# EAGLE board ElectroLab (EAGLE 9.5.1), part 1 of 2
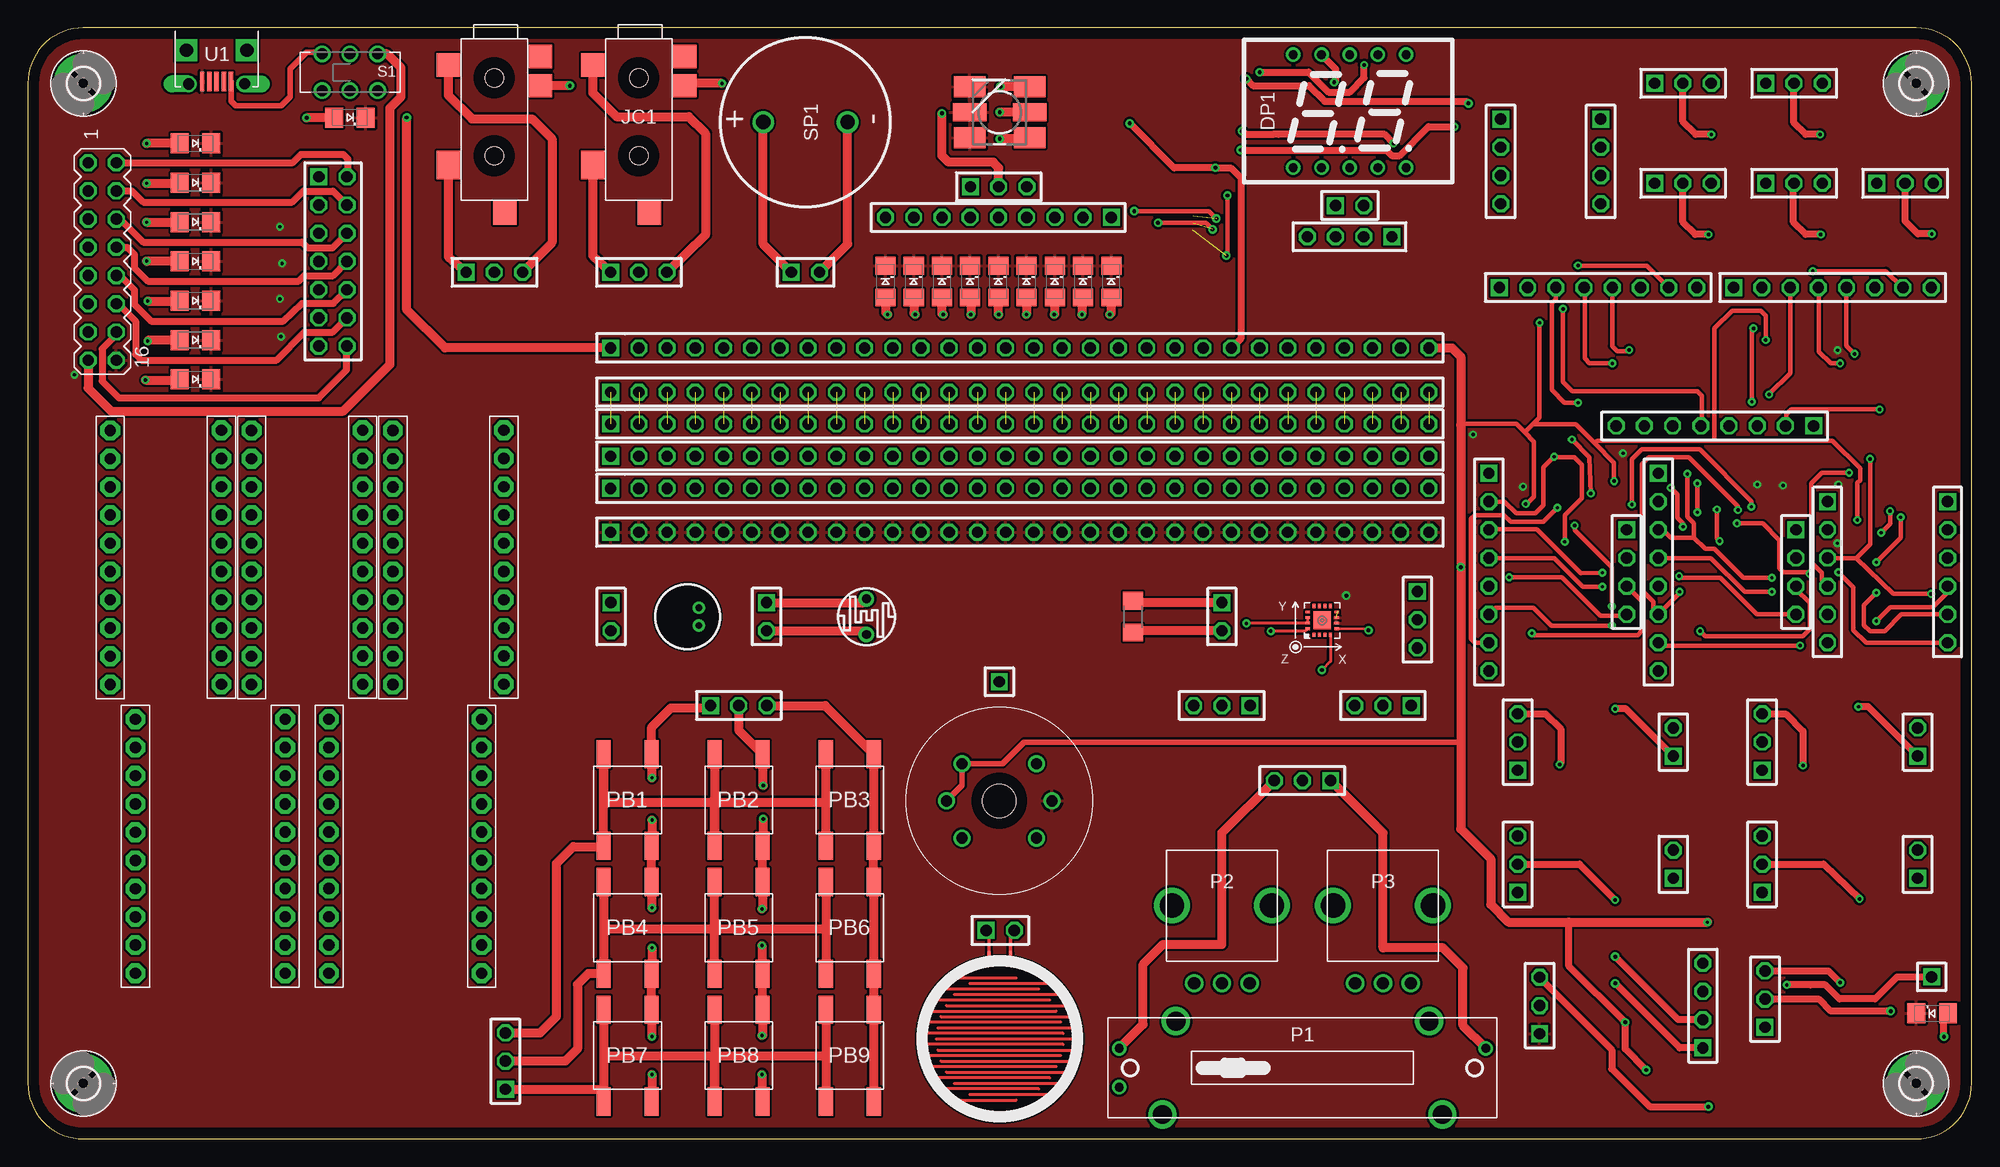
[diagram p0: board, top side]
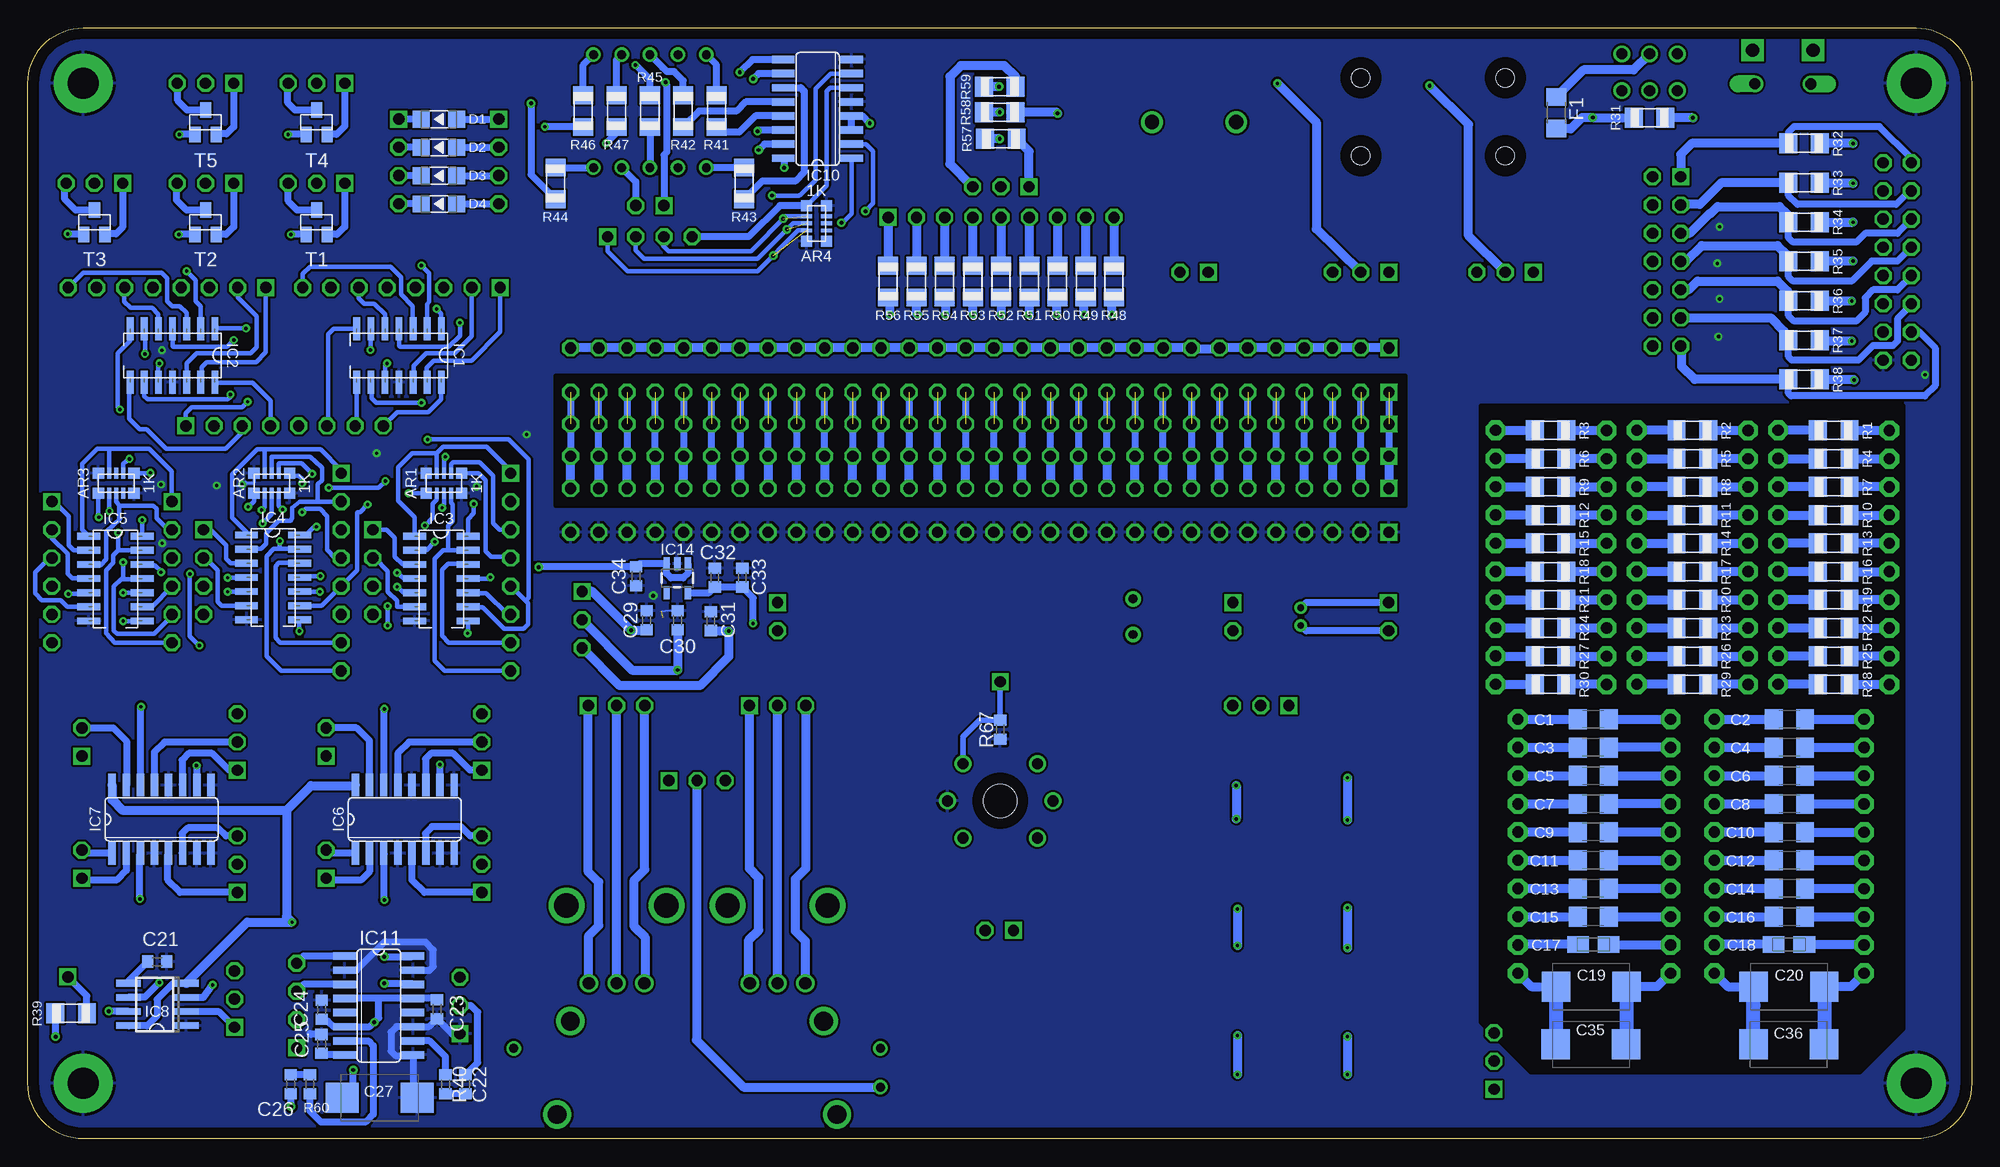
[diagram p1: board, bottom side, seen from below]

Size 175 x 100 mm. Coordinates in mm from the lower left corner, seen from the top.
Outline: 0,5 arc90 5,0 170,0 arc90 175,5 175,95 arc90 170,100 5,100 arc90 0,95 0,5
Copper layers (1*16): Top 0.035mm / dielectric 1.5mm / Bottom 0.035mm
Design rules "PCBWay": minimum track width 6mil, minimum drill 0.3mm, track to track 0.205mm, track to pad 0.205mm, pad to pad 0.205mm, via to via 0.205mm, smd to smd 8mil, copper to edge 40mil, drill to drill 8mil, minimum pad ring 10mil, minimum via ring 8mil, stop-mask expansion 4mil, vias tented up to drill 25mil, thermal gap 10mil
bRestrict: area 6.2,6 to 44.2,66; area 51,57 to 127.5,68.7

## Footprints (pad centres in the part's own frame; a part is rotated, then mirrored left to right if it is on the bottom)
RESISTOR_ARRAY_X8_CAY17 = smd 1 x 1: 1 -1.6,-0.9; 5 1.6,-0.9; 6 1.6,0.9; 10 -1.6,0.9 | smd 0.34 x 1: 2 -0.64,-0.9; 3 0,-0.9; 4 0.64,-0.9; 7 0.64,0.9; 8 0,0.9; 9 -0.64,0.9
C1206 = smd 1.6 x 1.8: 1 -1.4,0; 2 1.4,0
A/3216-18R = smd 1.95 x 1.5: + 1.375,0; - -1.375,0
D/7343-31R = smd 2.55 x 2.7: + 3.175,0; - -3.175,0
0603 = smd 1 x 1.1: 1 -0.86,0; 2 0.84,0
D/7343-31W = smd 2.95 x 2.7: + 3.375,0; - -3.375,0
LED-1206 = smd 1.5 x 1.5: + -1.6,0; - 1.6,0
2X7_SEGMENT_COMMON_CATODE_12_PINS = drill 0.8: 1 -5.08,-5.08; 2 -2.54,-5.08; 3 0,-5.08; 4 2.54,-5.08; 5 5.08,-5.08; 6 5.08,5.08; 7 2.54,5.08; 8 0,5.08; 9 -2.54,5.08; 10 -5.08,5.08
R1206 = smd 1.6 x 1.803: 1 -1.422,0; 2 1.422,0
2,8-PAD = drill 2.8 pad 5.334: B2,8 0,0
SOIC127P600X175-14N = smd 2.057 x 0.61: 1 -4.801,7.62; 2 -4.801,6.35; 3 -4.801,5.08; 4 -4.801,3.81; 5 -4.801,2.54; 6 -4.801,1.27; 7 -4.801,0; 8 0,0; 9 0,1.27; 10 0,2.54; 11 0,3.81; 12 0,5.08; 13 0,6.35; 14 0,7.62
SO16 = smd 0.66 x 2.032: 1 -4.445,-3.073; 2 -3.175,-3.073; 3 -1.905,-3.073; 4 -0.635,-3.073; 5 0.635,-3.073; 6 1.905,-3.073; 7 3.175,-3.073; 8 4.445,-3.073; 9 4.445,3.073; 10 3.175,3.073; 11 1.905,3.073; 12 0.635,3.073; 13 -0.635,3.073; 14 -1.905,3.073; 15 -3.175,3.073; 16 -4.445,3.073
SO08 = smd 0.6 x 2.2: 1 -1.905,-2.6; 2 -0.635,-2.6; 3 0.635,-2.6; 4 1.905,-2.6; 5 1.905,2.6; 6 0.635,2.6; 7 -0.635,2.6; 8 -1.905,2.6
SN74LS247D = smd 0.66 x 2.032: A -0.635,3.073; B 0.635,3.073; BI/RBO -0.635,-3.073; C 1.905,3.073; D 3.175,3.073; E 4.445,3.073; F -3.175,3.073; G -1.905,3.073; GND 4.445,-3.073; IA 3.175,-3.073; IB -4.445,-3.073; IC -3.175,-3.073; ID 1.905,-3.073; LT -1.905,-3.073; RBI 0.635,-3.073; VCC -4.445,3.073
SOP-16 = smd 0.66 x 2.032: 1 -4.445,-3.073; 2 -3.175,-3.073; 3 -1.905,-3.073; 4 -0.635,-3.073; 5 0.635,-3.073; 6 1.905,-3.073; 7 3.175,-3.073; 8 4.445,-3.073; 9 4.445,3.073; 10 3.175,3.073; 11 1.905,3.073; 12 0.635,3.073; 13 -0.635,3.073; 14 -1.905,3.073; 15 -3.175,3.073; 16 -4.445,3.073
LFCSP-3X3 = smd 0.25 x 0.4: 1 -0.75,-1.3; 2 -0.25,-1.3; 3 0.25,-1.3; 4 0.75,-1.3; 9 0.75,1.3; 10 0.25,1.3; 11 -0.25,1.3; 12 -0.75,1.3 | smd 0.4 x 0.25: 5 1.3,-0.75; 6 1.3,-0.25; 7 1.3,0.25; 8 1.3,0.75; 13 -1.3,0.75; 14 -1.3,0.25; 15 -1.3,-0.25; 16 -1.3,-0.75 | smd 1.6 x 1.6: EXP 0,0
SOT23-5 = smd 0.55 x 1.2: 1 -0.95,-1.3; 2 0,-1.3; 3 0.95,-1.3; 4 0.95,1.3; 5 -0.95,1.3
4-JACK-SMD = smd 2.108 x 2.108: 1 2.362,-1.143; 2 4.216,7.137; 4 1.6,7.137; 5 15.672,3.962 | smd 2.54 x 2.108: 3 11.354,-1.143 | hole 1.651: 3.505,2.997; 10.516,2.997
1206 = smd 1.6 x 1.803: A -1.422,0; C 1.422,0
TO-5_V10 = drill 0.8 pad 1.4: 1 -1.6,0; 2 1.6,0
PLCC-6 = smd 2.85 x 1.875: 1 -2.7,2.289; 3 -2.694,-2.292; 4 2.692,2.295; 6 2.697,-2.29 | smd 3 x 1.6: 2 -2.7,0; 5 2.696,0
WM-64PC/64PK = drill 0.6 pad 1: 1 -1,0.8; 2 -1,-0.8
R1206@1 = smd 1.6 x 1.803: 1 -1.422,0; 2 1.422,0
SLIDE_POT_20MM = drill 0.8: 1 -16.5,1.75; 2 -16.5,-1.75; 3 16.5,1.75 | drill 1.7: P$4 -12.6,-4.2; P$5 12.6,-4.2; P$6 -11.4,4.2; P$7 11.4,4.2
ALPS_RK09K_VERTICAL = drill 1.1: 1 -2.5,-7; 2 0,-7; 3 2.5,-7 | drill 2.2: P$1 -4.5,0; P$2 4.5,0
SW4-SMD-6.0X6.0X5.0MM = smd 2.54 x 1.27: 1 -4.129,2.159; 2 4.129,2.159; 3 -4.129,-2.159; 4 4.129,-2.159
1X01 = drill 1.016 square: 1 0,0
1X02 = drill 1.016 square: 1 -1.27,0 | drill 1.016 octagon: 2 1.27,0
1X03 = drill 1.016 square: 1 -2.54,0 | drill 1.016 octagon: 2 0,0; 3 2.54,0
1X30 = drill 1.016 square: 1 -36.83,0 | drill 1.016 octagon: 2 -34.29,0; 3 -31.75,0; 4 -29.21,0; 5 -26.67,0; 6 -24.13,0; 7 -21.59,0; 8 -19.05,0; 9 -16.51,0; 10 -13.97,0; 11 -11.43,0; 12 -8.89,0; 13 -6.35,0; 14 -3.81,0; 15 -1.27,0; 16 1.27,0; 17 3.81,0; 18 6.35,0; 19 8.89,0; 20 11.43,0; 21 13.97,0; 22 16.51,0; 23 19.05,0; 24 21.59,0; 25 24.13,0; 26 26.67,0; 27 29.21,0; 28 31.75,0; 29 34.29,0; 30 36.83,0
1X04 = drill 1.016 square: 1 -3.81,0 | drill 1.016 octagon: 2 -1.27,0; 3 1.27,0; 4 3.81,0
1X06 = drill 1.016 square: 1 -6.35,0 | drill 1.016 octagon: 2 -3.81,0; 3 -1.27,0; 4 1.27,0; 5 3.81,0; 6 6.35,0
2X07 = drill 1.016 square: 1 -7.62,-1.27 | drill 1.016 octagon: 2 -7.62,1.27; 3 -5.08,-1.27; 4 -5.08,1.27; 5 -2.54,-1.27; 6 -2.54,1.27; 7 0,-1.27; 8 0,1.27; 9 2.54,-1.27; 10 2.54,1.27; 11 5.08,-1.27; 12 5.08,1.27; 13 7.62,-1.27; 14 7.62,1.27
1X08 = drill 1.016 square: 1 -8.89,0 | drill 1.016 octagon: 2 -6.35,0; 3 -3.81,0; 4 -1.27,0; 5 1.27,0; 6 3.81,0; 7 6.35,0; 8 8.89,0
1X09 = drill 1.016 square: 1 -10.16,0 | drill 1.016 octagon: 2 -7.62,0; 3 -5.08,0; 4 -2.54,0; 5 0,0; 6 2.54,0; 7 5.08,0; 8 7.62,0; 9 10.16,0
1X10-BIG = drill 1.016 pad 1.778 octagon: 1 -11.43,0; 2 -8.89,0; 3 -6.35,0; 4 -3.81,0; 5 -1.27,0; 6 1.27,0; 7 3.81,0; 8 6.35,0; 9 8.89,0; 10 11.43,0
MA08-2 = drill 1.016 octagon: 1 -8.89,-1.27; 2 -8.89,1.27; 3 -6.35,-1.27; 4 -6.35,1.27; 5 -3.81,-1.27; 6 -3.81,1.27; 7 -1.27,-1.27; 8 -1.27,1.27; 9 1.27,-1.27; 10 1.27,1.27; 11 3.81,-1.27; 12 3.81,1.27; 13 6.35,-1.27; 14 6.35,1.27; 15 8.89,-1.27; 16 8.89,1.27
DPDT_JS202011CQN = drill 1: 1 -2.5,-1.65; 2 0,-1.651; 3 2.5,-1.65; 4 -2.5,1.65; 5 0,1.651; 6 2.5,1.65
32MM_SPEAKER = drill 1.3: + 0,3.8; - 0,-3.8
SOT23-BEC = smd 1 x 1.4: B -0.95,-1.1; C 0,1.1; E 0.95,-1.1
SOT23-BCE = smd 1 x 1.4: B -0.95,-1.1; C 0.95,-1.1; E 0,1.1
FCI-10103594-0001LF = smd 0.4 x 1.75: 1 -1.3,4.525; 2 -0.65,4.525; 3 0,4.525; 4 0.65,4.525; 5 1.3,4.525 | drill 1 offset: P$1 -2.52,4.73; P$2 2.52,4.74 | drill 1.2 pad 2 square: P$3 -2.725,1.7; P$4 2.725,1.7
MQ-3 = drill 1.016: A1 -3.35,3.35; A2 -3.35,-3.35; B1 3.35,3.35; B2 3.35,-3.35; HA -4.75,0; HB 4.75,0 | hole 3: 0,0
RESISTIVE_SENSOR_PAD = smd 0.305 x 0.61: 0 -0.95,7.65; 1 0.95,7.65

## Placement (x,y rotation side)
AR1  1K  [RESISTOR_ARRAY_X8_CAY17]  137.54,59.01 0 bottom
AR2  1K  [RESISTOR_ARRAY_X8_CAY17]  153.04,59.01 0 bottom
AR3  1K  [RESISTOR_ARRAY_X8_CAY17]  167.04,59.01 0 bottom
AR4  1K  [RESISTOR_ARRAY_X8_CAY17]  104,82.4 90 bottom
C1  10pF  [C1206]  34.07,37.76 180 bottom
C2  10pF  [C1206]  16.41,37.76 180 bottom
C3  100pF  [C1206]  34.07,35.22 180 bottom
C4  100pF  [C1206]  16.41,35.22 180 bottom
C5  1nF  [C1206]  34.07,32.68 180 bottom
C6  1nF  [C1206]  16.41,32.68 180 bottom
C7  10nF  [C1206]  34.07,30.14 180 bottom
C8  10nF  [C1206]  16.41,30.14 180 bottom
C9  47nF  [C1206]  34.07,27.6 180 bottom
C10  47nF  [C1206]  16.41,27.6 180 bottom
C11  100nF  [C1206]  34.07,25.06 180 bottom
C12  100nF  [C1206]  16.41,25.06 180 bottom
C13  1uF  [C1206]  34.07,22.52 180 bottom
C14  1uF  [C1206]  16.41,22.52 180 bottom
C15  10uF  [C1206]  34.07,19.98 180 bottom
C16  10uF  [C1206]  16.41,19.98 180 bottom
C17  100uF  [A/3216-18R]  34.05,17.5 0 bottom
C18  100uF  [A/3216-18R]  16.45,17.5 0 bottom
C19  470uF  [D/7343-31R]  34.25,13.7 0 bottom
C20  470uF  [D/7343-31R]  16.45,13.7 0 bottom
C21  10n  [0603]  163.34,15.96 0 bottom
C22  470n  [0603]  135.6,4.9 270 bottom
C23  1u  [0603]  138.16,11.66 270 bottom
C24  1u  [0603]  148.54,11.64 90 bottom
C25  100n  [0603]  148.56,8.56 90 bottom
C26  470n  [0603]  151.34,4.94 90 bottom
C27  470u  [D/7343-31W]  143.32,3.7 180 bottom
C29  10nF  [0603]  119.29,46.68 90 bottom
C30  10nF  [0603]  116.49,46.69 90 bottom
C31  10nF  [0603]  113.51,46.62 90 bottom
C32  100nF  [0603]  113.15,50.53 90 bottom
C33  10uF  [0603]  110.67,50.53 90 bottom
C34  10uF  [0603]  120.25,50.63 270 bottom
C35  470uF  [D/7343-31R]  34.28,8.5 0 bottom
C36  470uF  [D/7343-31R]  16.48,8.5 0 bottom
D1  [LED-1206]  137.99,91.77 180 bottom
D2  [LED-1206]  137.99,89.23 180 bottom
D3  [LED-1206]  137.99,86.69 180 bottom
D4  [LED-1206]  137.99,84.15 180 bottom
DP1  2X7_SEGMENT_COMMON_CATODE_12_PINS  [2X7_SEGMENT_COMMON_CATODE_12_PINS]  119,92.5 0 top
F1  500mA  [R1206]  37.38,92.35 270 bottom
H1  [2,8-PAD]  170,95 0 top
H2  [2,8-PAD]  170,5 0 top
H3  [2,8-PAD]  5,95 0 top
H4  [2,8-PAD]  5,5 90 top
IC1  LM2902DT  [SOIC127P600X175-14N]  145.39,68.1 270 bottom
IC2  LM2902DT  [SOIC127P600X175-14N]  165.78,68.1 270 bottom
IC3  SN74LV08ADR  [SOIC127P600X175-14N]  135.36,46.62 0 bottom
IC4  SN74LV32ADR  [SOIC127P600X175-14N]  150.51,46.72 0 bottom
IC5  SN74LV04ADR  [SOIC127P600X175-14N]  164.7,46.62 0 bottom
IC6  4027D  [SO16]  141.06,28.76 0 bottom
IC7  4027D  [SO16]  162.96,28.76 0 bottom
IC8  NE555D  [SO08]  163.33,12.1 90 bottom
IC10  CD4511BNSR  [SN74LS247D]  103.9,92.7 90 bottom
IC11  PAM8403  [SOP-16]  143.4,12 270 bottom
IC13  ADXL337  [LFCSP-3X3]  116.52,46.67 0 top
IC14  MIC5205  [SOT23-5]  116.53,50.46 180 bottom
JC1  SWTCHCRFT_3.5JACK5-JACK-SMD  [4-JACK-SMD]  52,99 270 top
JC2  SWTCHCRFT_3.5JACK5-JACK-SMD  [4-JACK-SMD]  39,99 270 top
L0  [1206]  29,91.92 0 top
L1  [1206]  15.09,89.59 0 top
L2  [1206]  15.09,86.05 0 top
L3  [1206]  15.09,82.51 0 top
L4  [1206]  15.09,78.97 0 top
L5  [1206]  15.09,75.43 0 top
L6  [1206]  15.09,71.89 0 top
L7  [1206]  15.09,68.35 0 top
L8  Grn  [1206]  77.22,77.15 90 top
L9  Grn  [1206]  79.76,77.15 90 top
L10  Grn  [1206]  82.3,77.15 90 top
L11  Ylw  [1206]  84.84,77.15 90 top
L12  Ylw  [1206]  87.38,77.15 90 top
L13  Ylw  [1206]  89.92,77.15 90 top
L14  Red  [1206]  92.46,77.15 90 top
L15  Red  [1206]  95,77.15 90 top
L16  Red  [1206]  97.54,77.15 90 top
L17  Grn  [1206]  171.44,11.3 180 top
LDR  [TO-5_V10]  75.5,47 270 top
LED_  [PLCC-6]  87.5,92.39 180 top
MIC  ELECTRET_MICROPHON-WM-64PC/64PK  [WM-64PC/64PK]  59.4,47 180 top
NTC  [R1206@1]  99.5,47 90 top
P1  [SLIDE_POT_20MM]  114.75,6.4 0 top
P2  [ALPS_RK09K_VERTICAL]  107.5,21 0 top
P3  [ALPS_RK09K_VERTICAL]  122,21 0 top
PB1  [SW4-SMD-6.0X6.0X5.0MM]  54,30.5 90 top
PB2  [SW4-SMD-6.0X6.0X5.0MM]  64,30.5 90 top
PB3  [SW4-SMD-6.0X6.0X5.0MM]  74,30.5 90 top
PB4  [SW4-SMD-6.0X6.0X5.0MM]  54,19 90 top
PB5  [SW4-SMD-6.0X6.0X5.0MM]  64,19 90 top
PB6  [SW4-SMD-6.0X6.0X5.0MM]  74,19 90 top
PB7  [SW4-SMD-6.0X6.0X5.0MM]  54,7.5 90 top
PB8  [SW4-SMD-6.0X6.0X5.0MM]  64,7.5 90 top
PB9  [SW4-SMD-6.0X6.0X5.0MM]  74,7.5 90 top
PH1  [1X01]  171.39,14.58 0 top
PH2  [1X02]  70,78 0 top
PH3  [1X02]  119,84 0 top
PH4  [1X02]  52.5,47 270 top
PH5  [1X02]  66.5,47 270 top
PH6  [1X02]  107.5,47 270 top
PH7  [1X02]  148.13,35.72 90 top
PH8  [1X02]  170.13,35.72 90 top
PH9  [1X02]  148.13,24.72 90 top
PH10  [1X02]  170.13,24.72 90 top
PH11  [1X03]  87.4,85.7 0 top
PH12  [1X03]  55,78 0 top
PH14  [1X03]  149,95 0 top
PH15  [1X03]  159,95 0 top
PH16  [1X03]  149,86 0 top
PH17  [1X03]  159,86 0 top
PH18  [1X03]  169,86 0 top
PH19  [1X03]  43,7 90 top
PH20  [1X03]  64,39 0 top
PH21  [1X02]  87.54,18.76 0 top
PH22  [1X03]  107.5,39 180 top
PH23  [1X03]  122,39 180 top
PH24  [1X03]  114.75,32.25 180 top
PH25  [1X03]  134.13,35.72 90 top
PH26  [1X03]  156.13,35.72 90 top
PH27  [1X03]  134.13,24.72 90 top
PH28  [1X03]  156.13,24.72 90 top
PH29  [1X03]  156.39,12.58 90 top
PH30  [1X03]  125.11,46.73 270 top
PH31  [1X30]  89.3,67.2 0 top
PH32  [1X04]  132.6,87.97 270 top
PH33  [1X04]  141.6,87.97 270 top
PH34  [1X01]  87.46,41.15 0 top
PH35  [1X04]  119,81.2 180 top
PH36  [1X04]  143.94,51.01 270 top
PH37  [1X04]  159.18,51.01 270 top
PH38  [1X03]  136.1,12 90 top
PH39  [1X06]  162.02,51.01 270 top
PH40  [1X06]  172.83,51.01 270 top
PH41  [2X07]  27.47,78.97 270 top
PH42  [1X08]  141.37,76.62 0 top
PH43  [1X08]  162.46,76.62 0 top
PH44  [1X08]  151.88,64.17 180 top
PH45  [1X08]  131.54,51.01 270 top
PH46  [1X08]  146.78,51.01 270 top
PH47  [1X09]  87.38,82.93 180 top
PH48  [1X10-BIG]  7.43,52.33 90 top
PH49  [1X10-BIG]  17.43,52.34 270 top
PH50  [1X10-BIG]  20.15,52.33 90 top
PH51  [1X10-BIG]  30.15,52.34 270 top
PH52  [1X10-BIG]  32.87,52.33 90 top
PH53  [1X10-BIG]  42.87,52.34 270 top
PH54  [1X10-BIG]  9.69,26.33 90 top
PH55  [1X10-BIG]  23.17,26.34 270 top
PH56  [1X10-BIG]  27.12,26.34 90 top
PH57  [1X10-BIG]  40.86,26.34 270 top
PH58  [1X30]  89.3,71.18 0 top
PH59  [1X30]  89.3,64.34 0 top
PH60  [1X30]  89.3,61.44 0 top
PH61  [1X30]  89.3,58.54 0 top
PH62  [1X30]  89.3,54.6 0 top
PH63  [MA08-2]  6.71,78.97 270 top
PH64  [1X03]  42,78 0 top
PH65  [1X04]  150.8,12 90 top
R1  100  [R1206]  12.43,63.76 180 bottom
R2  100  [R1206]  25.15,63.76 180 bottom
R3  100  [R1206]  37.92,63.76 180 bottom
R4  470  [R1206]  12.43,61.23 180 bottom
R5  470  [R1206]  25.15,61.22 180 bottom
R6  470  [R1206]  37.92,61.22 180 bottom
R7  1K  [R1206]  12.43,58.68 180 bottom
R8  1K  [R1206]  25.15,58.68 180 bottom
R9  1K  [R1206]  37.92,58.68 180 bottom
R10  4.7K  [R1206]  12.43,56.14 180 bottom
R11  4.7K  [R1206]  25.15,56.14 180 bottom
R12  4.7K  [R1206]  37.92,56.14 180 bottom
R13  10K  [R1206]  12.43,53.6 180 bottom
R14  10K  [R1206]  25.15,53.6 180 bottom
R15  10K  [R1206]  37.92,53.6 180 bottom
R16  10K  [R1206]  12.43,51.06 180 bottom
R17  10K  [R1206]  25.15,51.06 180 bottom
R18  10K  [R1206]  37.92,51.06 180 bottom
R19  15K  [R1206]  12.43,48.52 180 bottom
R20  15K  [R1206]  25.15,48.52 180 bottom
R21  15K  [R1206]  37.92,48.52 180 bottom
R22  47K  [R1206]  12.43,45.98 180 bottom
R23  47K  [R1206]  25.15,45.98 180 bottom
R24  47K  [R1206]  37.92,45.98 180 bottom
R25  100K  [R1206]  12.43,43.44 180 bottom
R26  100K  [R1206]  25.15,43.44 180 bottom
R27  100K  [R1206]  37.92,43.44 180 bottom
R28  470K  [R1206]  12.43,40.9 180 bottom
R29  470K  [R1206]  25.15,40.9 180 bottom
R30  470K  [R1206]  37.92,40.9 180 bottom
R31  470  [R1206]  29,91.92 0 bottom
R32  330  [R1206]  15.09,89.59 180 bottom
R33  330  [R1206]  15.09,86.05 180 bottom
R34  330  [R1206]  15.09,82.51 180 bottom
R35  330  [R1206]  15.09,78.97 180 bottom
R36  330  [R1206]  15.09,75.43 180 bottom
R37  330  [R1206]  15.09,71.89 180 bottom
R38  330  [R1206]  15.09,68.35 180 bottom
R39  330  [R1206]  171.1,11.3 0 bottom
R40  10k  [0603]  137.4,4.9 270 bottom
R41  330  [R1206]  113,92.5 90 bottom
R42  330  [R1206]  116,92.5 90 bottom
R43  330  [R1206]  110.5,86 90 bottom
R44  330  [R1206]  127.5,86 90 bottom
R45  330  [R1206]  119,92.5 270 bottom
R46  330  [R1206]  125,92.5 90 bottom
R47  330  [R1206]  122,92.5 90 bottom
R48  330  [R1206]  77.22,77.15 90 bottom
R49  330  [R1206]  79.76,77.15 90 bottom
R50  330  [R1206]  82.3,77.15 90 bottom
R51  330  [R1206]  84.84,77.15 90 bottom
R52  330  [R1206]  87.38,77.15 90 bottom
R53  330  [R1206]  89.92,77.15 90 bottom
R54  330  [R1206]  92.46,77.15 90 bottom
R55  330  [R1206]  95,77.15 90 bottom
R56  330  [R1206]  97.54,77.15 90 bottom
R57  150  [R1206]  87.4,90 0 bottom
R58  150  [R1206]  87.5,92.4 0 bottom
R59  220  [R1206]  87.5,94.7 0 bottom
R60  10k  [0603]  149.6,4.94 90 bottom
R67  10k  [0603]  87.46,36.84 90 bottom
S1  [DPDT_JS202011CQN]  29,96 180 top
SP1  32MM_SPEAKER  [32MM_SPEAKER]  70,91.5 90 top
T1  [SOT23-BEC]  149,82.5 0 bottom
T2  [SOT23-BEC]  159,82.5 0 bottom
T3  [SOT23-BEC]  169,82.5 0 bottom
T4  [SOT23-BCE]  149,91.5 0 bottom
T5  [SOT23-BCE]  159,91.5 0 bottom
U1  USB  [FCI-10103594-0001LF]  17,99.68 180 top
U2  GAS_SENSOR  [MQ-3]  87.46,30.42 0 top
U$16  RESISTIVE_SENSOR_PAD  [RESISTIVE_SENSOR_PAD]  87.5,9 0 top

## Library data of the parts
AR1-AR4 DP1 IC10 P1 SP1 U$16 = SpaceDIY
C1-C16 R1-R39 R41-R59 = resistor
C17-C20 C27 C35 C36 = rcl; SPICEPREFIX: C
C21-C26 C29-C34 LED_ R40 R60 R67 = SpaceDIY_passive_components
D1-D4 = Seeed-OPL-Diode; MPN: CD1206-S01575
F1 IC8 L0 L1-L17 NTC PH48-PH57 = adafruit
H1-H4 = holes
IC1 IC2 = Texas Instruments_By_element14_Batch_1; MPN: LM2902DT; OC_FARNELL: 1263036; OC_NEWARK: 89K1301; PACKAGE: SOIC-14; SUPPLIER: TEXAS INSTRUMENTS
IC3 = Texas Instruments_By_element14_Batch_1; MPN: SN74LVC08AD; OC_FARNELL: 1102972; OC_NEWARK: 45C6937; PACKAGE: SOIC-14; SUPPLIER: Texas Instruments
IC4 = Texas Instruments_By_element14_Batch_1; MPN: SN74S32D; OC_FARNELL: 1741242; OC_NEWARK: 50R6794; PACKAGE: 14-SOIC; SUPPLIER: Texas Instruments
IC5 = Texas Instruments_By_element14_Batch_1; MPN: SN74LV04ADR; OC_FARNELL: 1236261; OC_NEWARK: 13M5347; PACKAGE: SOIC-14; SUPPLIER: Texas Instruments
IC6 IC7 = 40xx
IC11 = PAM8403
IC13 = SpaceDIY_IC
IC14 U2 = SparkFun
JC1 JC2 = jmsaavedra
LDR = photo-elements
MIC = microphon
P2 P3 = audio-pots
PB1-PB9 = Seeed-OPL-Switch; MPN: TS-1109
PH1-PH12 PH14-PH47 PH58-PH62 PH64 PH65 = pinhead
PH63 = con-lstb; OC_FARNELL: unknown; OC_NEWARK: unknown
S1 = bt_electromech
T1-T5 = transistor
U1 = daspilker

## Nets
3.3V: C32.1 C33.1 IC13.14 IC13.15 IC14.5
A1A: AR1.9 IC3.1 PH45.1
A1B: AR1.8 IC3.2 PH45.2
A1Y: IC3.3 PH36.1
A2A: AR1.7 IC3.4 PH45.3
A2B: AR1.6 IC3.5 PH45.4
A2Y: IC3.6 PH36.2
A3A: AR1.1 IC3.9 PH45.5
A3B: AR1.2 IC3.10 PH45.6
A3Y: IC3.8 PH36.3
A4A: AR1.3 IC3.12 PH45.7
A4B: AR1.4 IC3.13 PH45.8
A4Y: IC3.11 PH36.4
B: PH11.3 R59.2
D0: PH41.1 PH63.1 R32.2
D1: PH41.2 PH63.2
D2: PH41.3 PH63.3 R33.2
D3: PH41.4 PH63.4
D4: PH41.5 PH63.5 R34.2
D5: PH41.6 PH63.6
D6: PH41.7 PH63.7 R35.2
D7: PH41.8 PH63.8
D8: PH41.9 PH63.9 R36.2
D9: PH41.10 PH63.10
D10: PH41.11 PH63.11 R37.2
D11: PH41.12 PH63.12
D12: PH41.13 PH63.13 R38.2
D13: PH41.14 PH63.14
DG1: DP1.9 PH3.1
DG2: DP1.4 PH3.2
DP: DP1.2
G: PH11.2 R58.2
GND: AR1.5 AR1.10 AR2.5 AR2.10 AR3.5 AR3.10 AR4.5 AR4.10 C21.2 C23.2 C24.2 C25.2 C27.- C29.2 C30.2 C31.2 C32.2 C33.2 C34.2 H1.B2,8 H2.B2,8 H3.B2,8 H4.B2,8 IC1.11 IC2.11 IC3.7 IC4.7 IC5.7 IC6.4 IC6.7 IC6.8 IC6.9 IC6.12 IC7.4 IC7.7 IC7.8 IC7.9 IC7.12 IC8.1 IC10.GND IC10.RBI IC11.2 IC11.9 IC11.11 IC11.15 IC13.6 IC13.7 IC14.2 L0.C L1.C L2.C L3.C L4.C L5.C L6.C L7.C L8.C L9.C L10.C L11.C L12.C L13.C L14.C L15.C L16.C L17.C LED_.4 LED_.5 LED_.6 PH38.1 PH62.1 PH62.2 PH62.3 PH62.4 PH62.5 PH62.6 PH62.7 PH62.8 PH62.9 PH62.10 PH62.11 PH62.12 PH62.13 PH62.14 PH62.15 PH62.16 PH62.17 PH62.18 PH62.19 PH62.20 PH62.21 PH62.22 PH62.23 PH62.24 PH62.25 PH62.26 PH62.27 PH62.28 PH62.29 PH62.30 PH63.16 R67.1 U1.5 U2.HB
I1A: AR3.9 IC5.1 PH39.1
I1Y: IC5.2 PH40.1
I2A: AR3.3 IC5.3 PH39.2
I2Y: IC5.4 PH40.2
I3A: AR3.7 IC5.5 PH39.3
I3Y: IC5.6 PH40.3
I4A: AR3.6 IC5.9 PH39.4
I4Y: IC5.8 PH40.4
I5A: AR3.1 IC5.11 PH39.5
I5Y: IC5.10 PH40.5
I6A: AR3.2 IC5.13 PH39.6
I6Y: IC5.12 PH40.6
IA: AR4.9 IC10.IA PH35.1
IB: AR4.8 IC10.IB PH35.2
IC: AR4.7 IC10.IC PH35.3
ID: AR4.6 IC10.ID PH35.4
IN_L: C26.1 PH38.3
IN_R: C22.1 PH38.2
INL: IC11.7 R60.1
INR: IC11.10 R40.1
JC1: JC1.2 PH12.2
JC2: JC2.2 PH64.2
L1: PH47.9 R48.2
L2: PH47.8 R49.2
L3: PH47.7 R50.2
L4: PH47.6 R51.2
L5: PH47.5 R52.2
L6: PH47.4 R53.2
L7: PH47.3 R54.2
L8: PH47.2 R55.2
L9: PH47.1 R56.2
MUTE: IC11.5
N$1: PH48.10 R1.1
N$2: PH48.9 R4.1
N$3: PH48.8 R7.1
N$4: PH48.7 R10.1
N$5: PH48.6 R13.1
N$6: PH48.5 R16.1
N$7: PH48.4 R19.1
N$8: PH48.3 R22.1
N$9: PH48.2 R25.1
N$10: PH48.1 R28.1
N$11: PH49.10 R28.2
N$12: PH49.9 R25.2
N$13: PH49.8 R22.2
N$14: PH49.7 R19.2
N$15: PH49.5 R13.2
N$16: PH49.6 R16.2
N$17: PH49.4 R10.2
N$18: PH49.3 R7.2
N$19: PH49.2 R4.2
N$20: PH49.1 R1.2
N$21: PH50.10 R2.1
N$22: PH50.9 R5.1
N$23: PH50.8 R8.1
N$24: PH50.7 R11.1
N$25: PH50.6 R14.1
N$26: PH50.5 R17.1
N$27: PH50.4 R20.1
N$28: PH50.3 R23.1
N$29: PH50.2 R26.1
N$30: PH50.1 R29.1
N$31: PH51.10 R29.2
N$32: PH51.9 R26.2
N$33: PH51.8 R23.2
N$34: PH51.7 R20.2
N$35: PH51.6 R17.2
N$36: PH51.5 R14.2
N$37: PH51.4 R11.2
N$38: PH51.3 R8.2
N$39: PH51.2 R5.2
N$40: PH51.1 R2.2
N$41: PH52.10 R3.1
N$42: PH52.9 R6.1
N$43: PH52.8 R9.1
N$44: PH52.7 R12.1
N$45: PH52.6 R15.1
N$46: PH52.5 R18.1
N$47: PH52.4 R21.1
N$48: PH52.3 R24.1
N$49: PH52.2 R27.1
N$50: PH52.1 R30.1
N$51: PH53.10 R30.2
N$52: PH53.9 R27.2
N$53: PH53.8 R24.2
N$54: PH53.7 R21.2
N$55: PH53.6 R18.2
N$56: PH53.5 R15.2
N$57: PH53.4 R12.2
N$58: PH53.3 R9.2
N$59: PH53.2 R6.2
N$60: PH53.1 R3.2
N$61: C1.1 PH56.10
N$62: C3.1 PH56.9
N$63: C5.1 PH56.8
N$64: C7.1 PH56.7
N$65: C9.1 PH56.6
N$66: C11.1 PH56.5
N$67: C13.1 PH56.4
N$68: C15.1 PH56.3
N$69: C17.+ PH56.2
N$70: C19.+ C35.+ PH56.1
N$71: C1.2 PH57.1
N$72: C3.2 PH57.2
N$73: C5.2 PH57.3
N$74: C7.2 PH57.4
N$75: C9.2 PH57.5
N$76: C11.2 PH57.6
N$77: C13.2 PH57.7
N$78: C15.2 PH57.8
N$79: C17.- PH57.9
N$80: C19.- C35.- PH57.10
N$81: C2.1 PH54.10
N$82: C4.1 PH54.9
N$83: C6.1 PH54.8
N$84: C8.1 PH54.7
N$85: C10.1 PH54.6
N$86: C12.1 PH54.5
N$87: C14.1 PH54.4
N$88: C16.1 PH54.3
N$89: C18.+ PH54.2
N$90: C20.+ C36.+ PH54.1
N$91: C20.- C36.- PH55.10
N$92: C18.- PH55.9
N$93: C16.2 PH55.8
N$94: C14.2 PH55.7
N$95: C12.2 PH55.6
N$96: C10.2 PH55.5
N$97: C8.2 PH55.4
N$98: C6.2 PH55.3
N$99: C4.2 PH55.2
N$100: C2.2 PH55.1
N$101: D4.+ PH32.4
N$102: L1.A R32.1
N$103: L0.A R31.2
N$104: L2.A R33.1
N$105: L3.A R34.1
N$106: L4.A R35.1
N$107: L5.A R36.1
N$108: L6.A R37.1
N$109: L7.A R38.1
N$110: D4.- PH33.4
N$111: D1.+ PH32.1
N$112: IC6.1 PH9.2
N$113: IC6.15 PH7.2
N$114: IC7.1 PH10.2
N$115: IC7.15 PH8.2
N$116: JC1.3 PH12.1
N$117: LED_.2 R58.1
N$118: F1.1 S1.2
N$119: PH34.1 R67.2 U2.B1
N$120: JC2.1 PH64.3
N$121: JC2.3 PH64.1
N$122: L17.A R39.1
N$123: C26.2 R60.2
N$124: C22.2 R40.2
N$125: PH21.1 U$16.0
N$126: PH21.2 U$16.1
N$127: PH31.7 PH59.7 PH60.7 PH61.7
N$128: PH31.1 PH59.1 PH60.1 PH61.1
N$129: PH31.2 PH59.2 PH60.2 PH61.2
N$130: IC1.13 PH42.1
N$131: IC1.12 PH42.2
N$132: IC1.9 PH42.3
N$133: IC1.10 PH42.4
N$134: IC1.6 PH42.5
N$135: IC1.5 PH42.6
N$136: IC1.2 PH42.7
N$137: IC1.3 PH42.8
N$138: IC2.13 PH43.1
N$139: PH31.3 PH59.3 PH60.3 PH61.3
N$140: PH31.4 PH59.4 PH60.4 PH61.4
N$141: PH31.5 PH59.5 PH60.5 PH61.5
N$142: PH31.6 PH59.6 PH60.6 PH61.6
N$143: PH31.8 PH59.8 PH60.8 PH61.8
N$144: PH31.9 PH59.9 PH60.9 PH61.9
N$145: PH31.10 PH59.10 PH60.10 PH61.10
N$146: IC6.5 PH27.1
N$147: PH31.11 PH59.11 PH60.11 PH61.11
N$148: PH31.12 PH59.12 PH60.12 PH61.12
N$149: PH31.13 PH59.13 PH60.13 PH61.13
N$150: PH31.14 PH59.14 PH60.14 PH61.14
N$151: PH31.15 PH59.15 PH60.15 PH61.15
N$152: PH31.16 PH59.16 PH60.16 PH61.16
N$153: PH31.17 PH59.17 PH60.17 PH61.17
N$154: PH31.18 PH59.18 PH60.18 PH61.18
N$155: IC6.3 PH27.2
N$156: IC6.6 PH27.3
N$157: IC6.11 PH25.1
N$158: IC6.13 PH25.2
N$159: IC6.10 PH25.3
N$160: IC7.5 PH28.1
N$161: IC7.3 PH28.2
N$162: IC7.6 PH28.3
N$163: PH31.19 PH59.19 PH60.19 PH61.19
N$164: PH31.20 PH59.20 PH60.20 PH61.20
N$165: PH31.21 PH59.21 PH60.21 PH61.21
N$166: PH31.22 PH59.22 PH60.22 PH61.22
N$167: PH31.23 PH59.23 PH60.23 PH61.23
N$168: PH31.24 PH59.24 PH60.24 PH61.24
N$169: PH31.25 PH59.25 PH60.25 PH61.25
N$170: PH31.26 PH59.26 PH60.26 PH61.26
N$171: IC7.11 PH26.1
N$172: IC7.13 PH26.2
N$173: IC7.10 PH26.3
N$174: PH31.27 PH59.27 PH60.27 PH61.27
N$175: PH31.28 PH59.28 PH60.28 PH61.28
N$176: PH31.29 PH59.29 PH60.29 PH61.29
N$177: PH31.30 PH59.30 PH60.30 PH61.30
N$178: IC6.2 PH9.1
N$179: IC6.14 PH7.1
N$180: IC7.2 PH10.1
N$181: IC7.14 PH8.1
N$183: D3.+ PH32.3
N$184: D2.+ PH32.2
N$186: IC2.12 PH43.2
N$187: IC2.9 PH43.3
N$188: IC2.10 PH43.4
N$189: IC2.6 PH43.5
N$190: IC2.5 PH43.6
N$191: IC2.2 PH43.7
N$192: IC2.3 PH43.8
N$193: IC1.14 PH44.8
N$194: IC1.8 PH44.7
N$195: IC1.7 PH44.6
N$196: IC1.1 PH44.5
N$197: IC2.14 PH44.4
N$198: IC2.8 PH44.3
N$199: D1.- PH33.1
N$200: IC2.7 PH44.2
N$201: IC2.1 PH44.1
N$202: D2.- PH33.2
N$203: D3.- PH33.3
N$205: PH16.1 T1.E
N$206: PH16.2 T1.B
N$207: PH16.3 T1.C
N$208: PH17.1 T2.E
N$209: PH17.2 T2.B
N$210: PH17.3 T2.C
N$211: PH18.1 T3.E
N$212: PH18.2 T3.B
N$213: PH18.3 T3.C
N$217: PH14.1 T4.C
N$218: PH14.2 T4.B
N$219: PH14.3 T4.E
N$220: PH15.1 T5.C
N$221: PH15.2 T5.B
N$222: PH15.3 T5.E
N$223: IC8.2 PH29.1
N$224: IC8.3 PH1.1 R39.2
N$225: C21.1 IC8.5
N$226: IC8.7 PH29.2
N$227: IC8.6 PH29.3
N$228: PB1.1 PB1.2 PB2.1 PB2.2 PB3.1 PB3.2 PH19.3
N$229: PB4.1 PB4.2 PB5.1 PB5.2 PB6.1 PB6.2 PH19.2
N$230: PB7.1 PB7.2 PB8.1 PB8.2 PB9.1 PB9.2 PH19.1
N$231: PB1.3 PB1.4 PB4.3 PB4.4 PB7.3 PB7.4 PH20.1
N$232: PB2.3 PB2.4 PB5.3 PB5.4 PB8.3 PB8.4 PH20.2
N$233: PB3.3 PB3.4 PB6.3 PB6.4 PB9.3 PB9.4 PH20.3
N$234: LDR.1 PH5.1
N$235: LDR.2 PH5.2
N$236: NTC.2 PH6.1
N$237: P2.3 PH22.1
N$238: P2.2 PH22.2
N$239: P2.1 PH22.3
N$240: P1.3 PH24.1
N$241: P1.2 PH24.2
N$242: P1.1 PH24.3
N$243: P3.3 PH23.1
N$244: P3.2 PH23.2
N$245: P3.1 PH23.3
N$249: MIC.2 PH4.1
N$250: MIC.1 PH4.2
N$256: NTC.1 PH6.2
N$257: PH2.1 SP1.+
N$264: JC1.1 PH12.3
N$291: PH2.2 SP1.-
N$292: L8.A R48.1
N$300: L9.A R49.1
N$301: L10.A R50.1
N$302: L11.A R51.1
N$303: L12.A R52.1
N$304: L13.A R53.1
N$305: L14.A R54.1
N$306: L15.A R55.1
N$307: L16.A R56.1
N$308: LED_.1 R57.1
N$310: LED_.3 R59.1
O1A: AR2.9 IC4.1 PH46.1
O1B: AR2.8 IC4.2 PH46.2
O1Y: IC4.3 PH37.1
O2A: AR2.7 IC4.4 PH46.3
O2B: AR2.6 IC4.5 PH46.4
O2Y: IC4.6 PH37.2
O3A: AR2.1 IC4.9 PH46.5
O3B: AR2.2 IC4.10 PH46.6
O3Y: IC4.8 PH37.3
O4A: AR2.3 IC4.12 PH46.7
O4B: AR2.4 IC4.13 PH46.8
O4Y: IC4.11 PH37.4
OUT_L+: IC11.1 PH65.4
OUT_L-: IC11.3 PH65.3
OUT_R+: IC11.16 PH65.2
OUT_R-: IC11.14 PH65.1
R: PH11.1 R57.2
SA: DP1.10 R41.2
SA': IC10.A R41.1
SB: DP1.8 R42.2
SB': IC10.B R42.1
SC: DP1.1 R43.2
SC': IC10.C R43.1
SD: DP1.5 R44.2
SD': IC10.D R44.1
SE: DP1.3 R45.2
SE': IC10.E R45.1
SF: DP1.6 R46.2
SF': IC10.F R46.1
SG: DP1.7 R47.2
SG': IC10.G R47.1
SHDN: IC11.12
VCC: C23.1 C24.1 C27.+ C34.1 F1.2 IC1.4 IC2.4 IC3.14 IC4.14 IC5.14 IC6.16 IC7.16 IC8.4 IC8.8 IC10.BI/RBO IC10.LT IC10.VCC IC11.4 IC11.6 IC11.13 IC14.1 IC14.3 PH58.1 PH58.2 PH58.3 PH58.4 PH58.5 PH58.6 PH58.7 PH58.8 PH58.9 PH58.10 PH58.11 PH58.12 PH58.13 PH58.14 PH58.15 PH58.16 PH58.17 PH58.18 PH58.19 PH58.20 PH58.21 PH58.22 PH58.23 PH58.24 PH58.25 PH58.26 PH58.27 PH58.28 PH58.29 PH58.30 R31.1 U2.A1 U2.HA
VEXT: PH63.15 S1.1
VREF: C25.1 IC11.8
VUSB: S1.3 U1.1
X+: C29.1 IC13.5 PH30.1
Y+: C30.1 IC13.4 PH30.2
Z+: C31.1 IC13.16 PH30.3